# Altium PCB PCB1.PcbDoc
Units mil, origin at the board's own origin, x right, y up, seen from the top; angles counter-clockwise.
Board outline 2500 x 3900 mil, 4 copper layers (Top Layer, Int1 (GND), Int2 (GND), Bottom Layer), stack 53.912 mil thick; 72 components, 56 nets, 270 pads, 13 vias.
Unrouted connection lines stored in the file: 166.
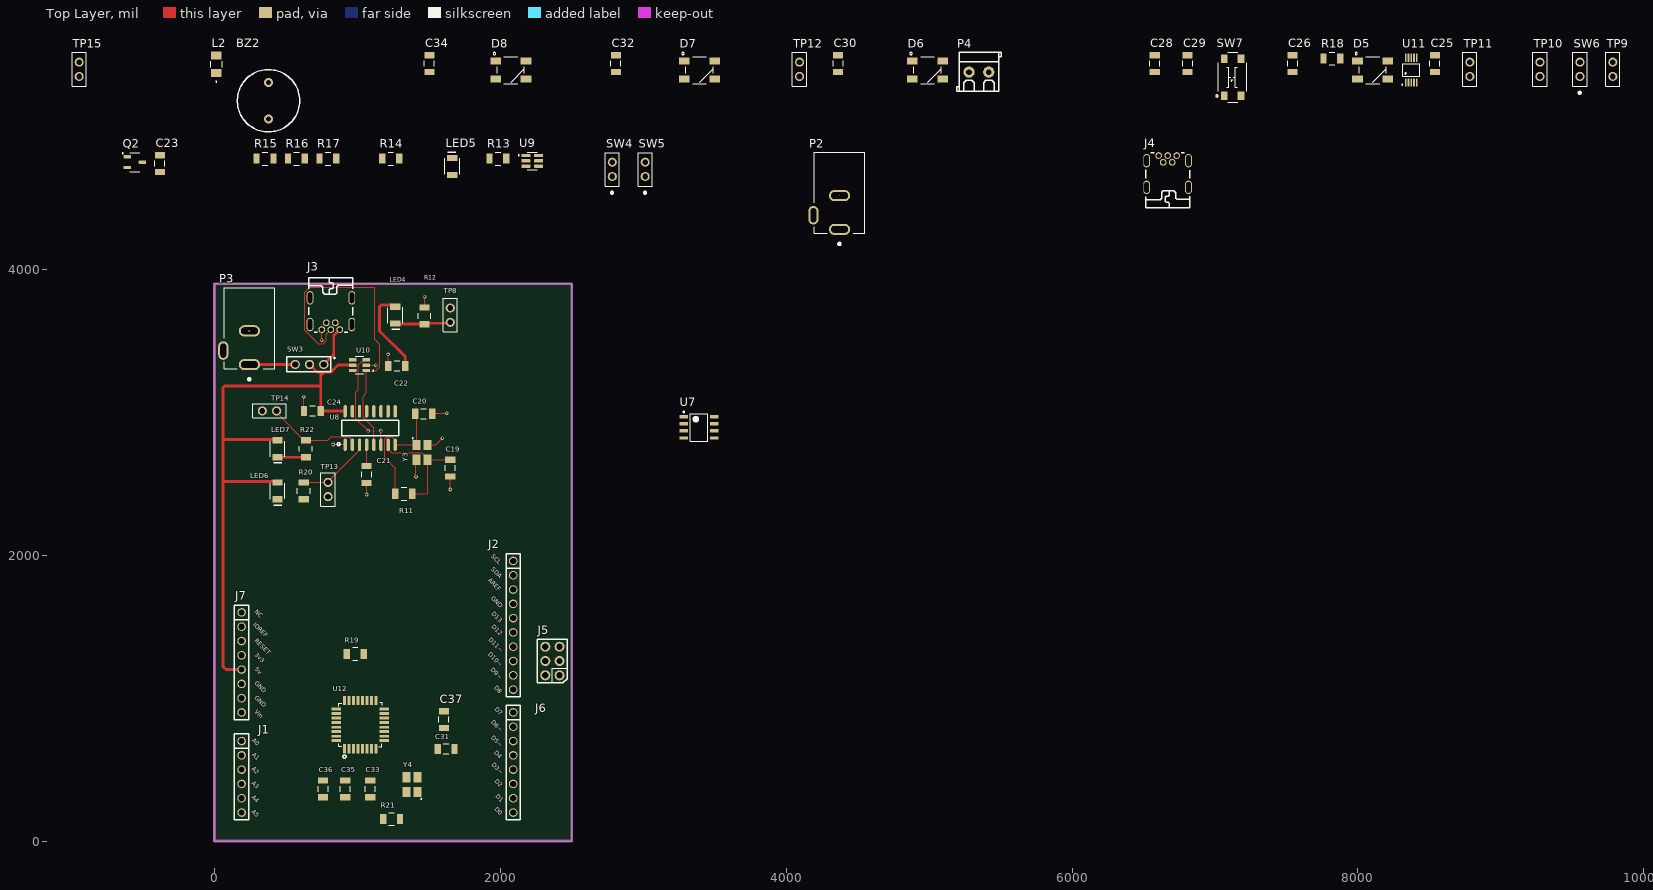
[diagram p0: Top Layer view]
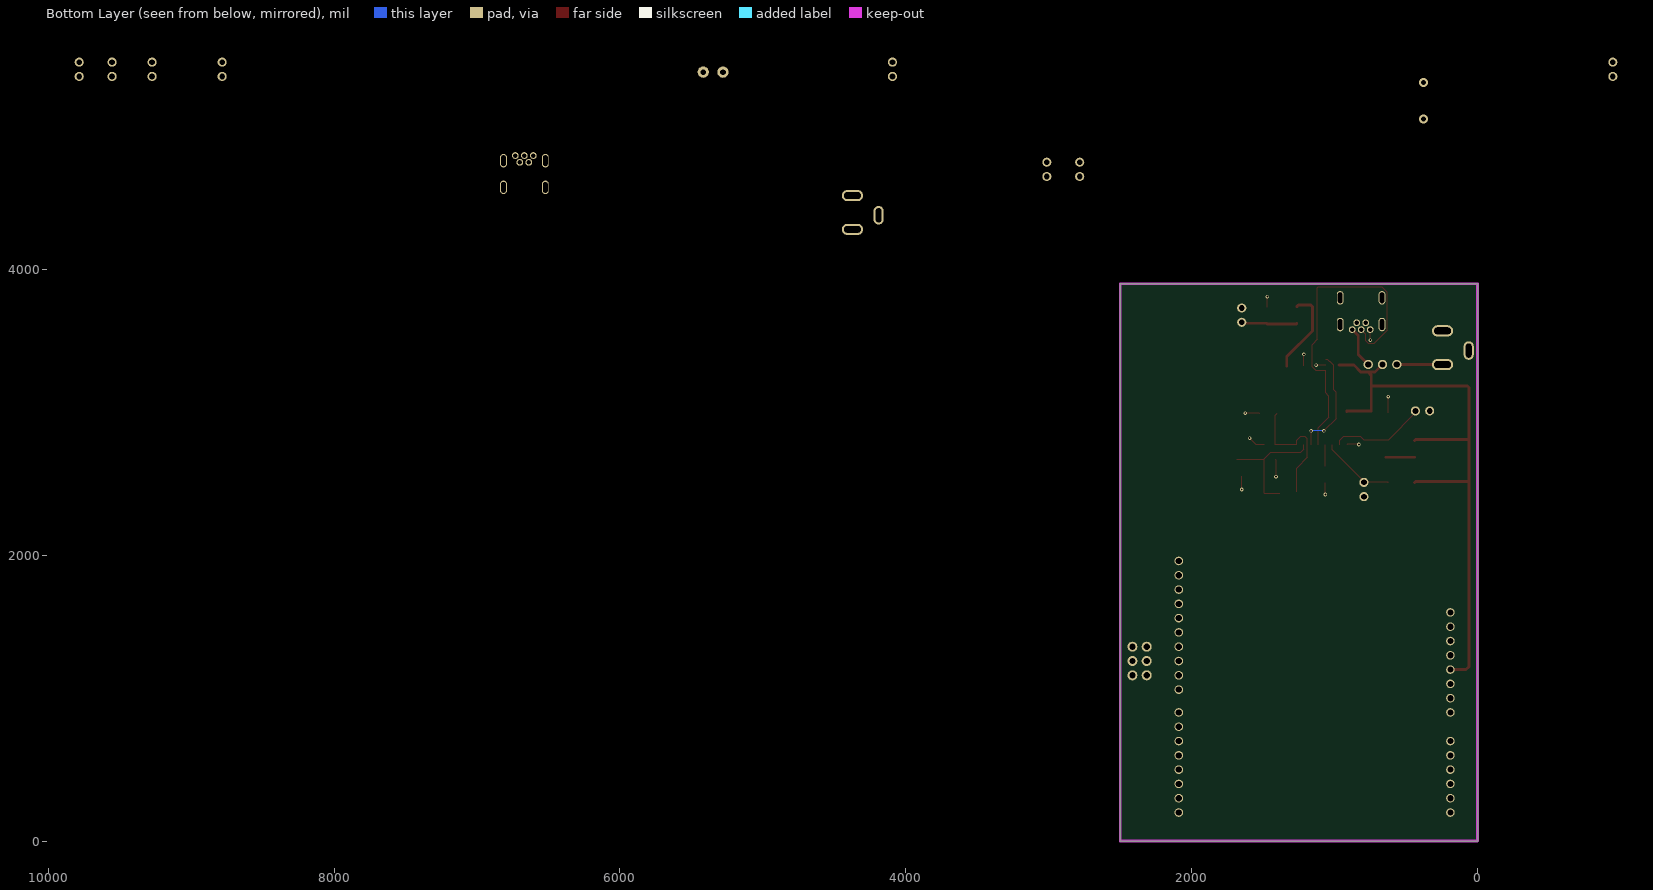
[diagram p1: Bottom Layer view, seen from below]
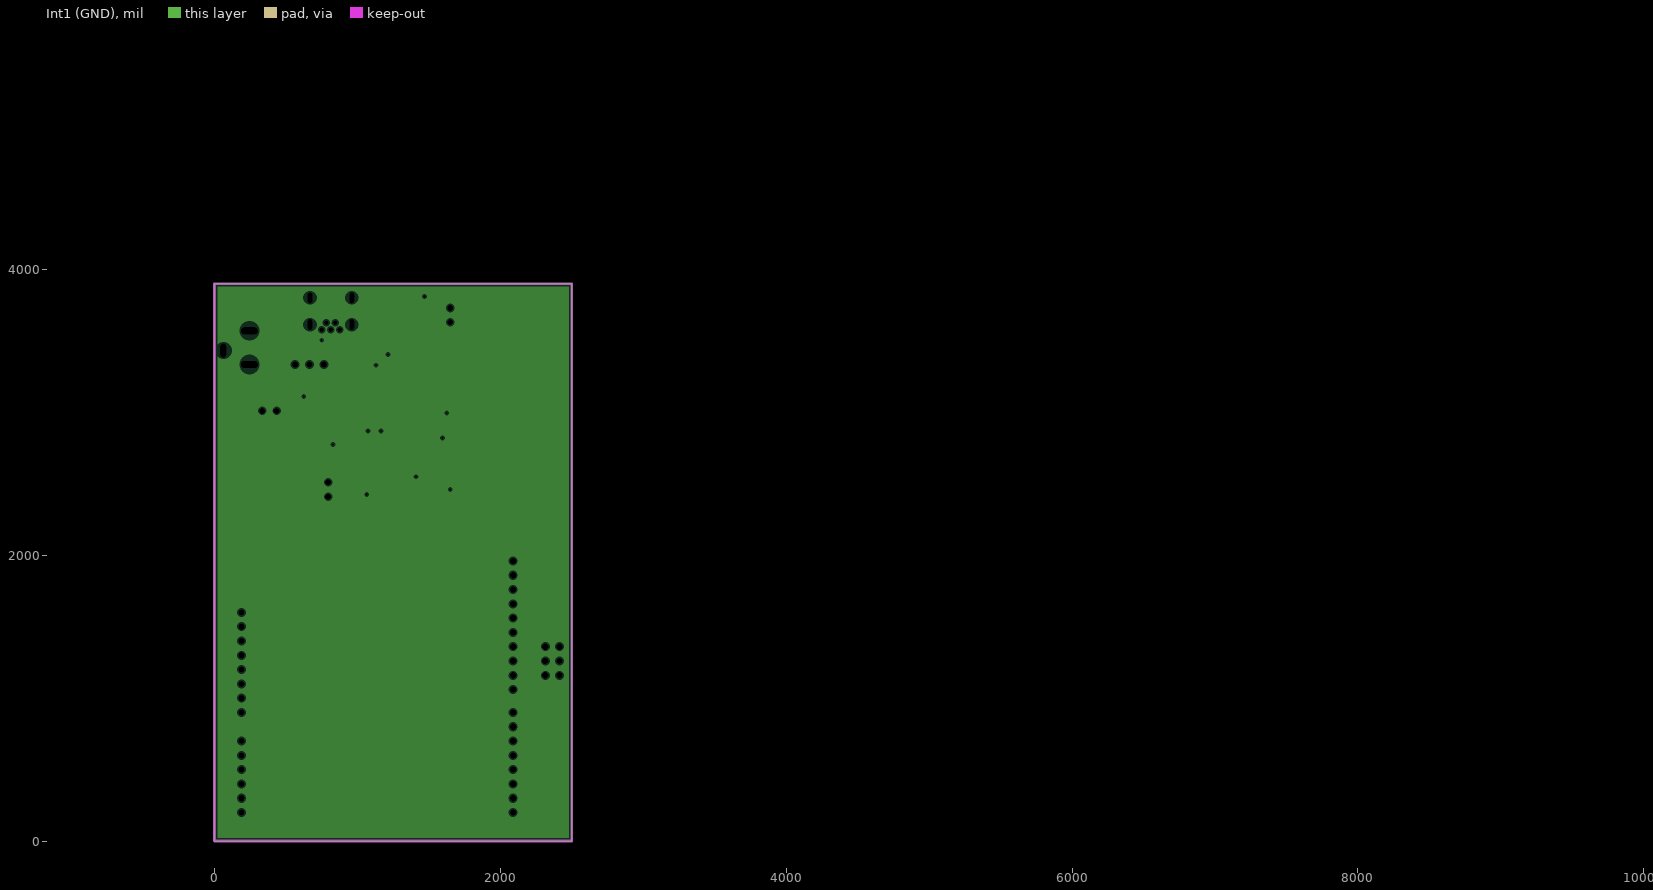
[diagram p2: Int1 (GND), clearances drawn from the general rule]
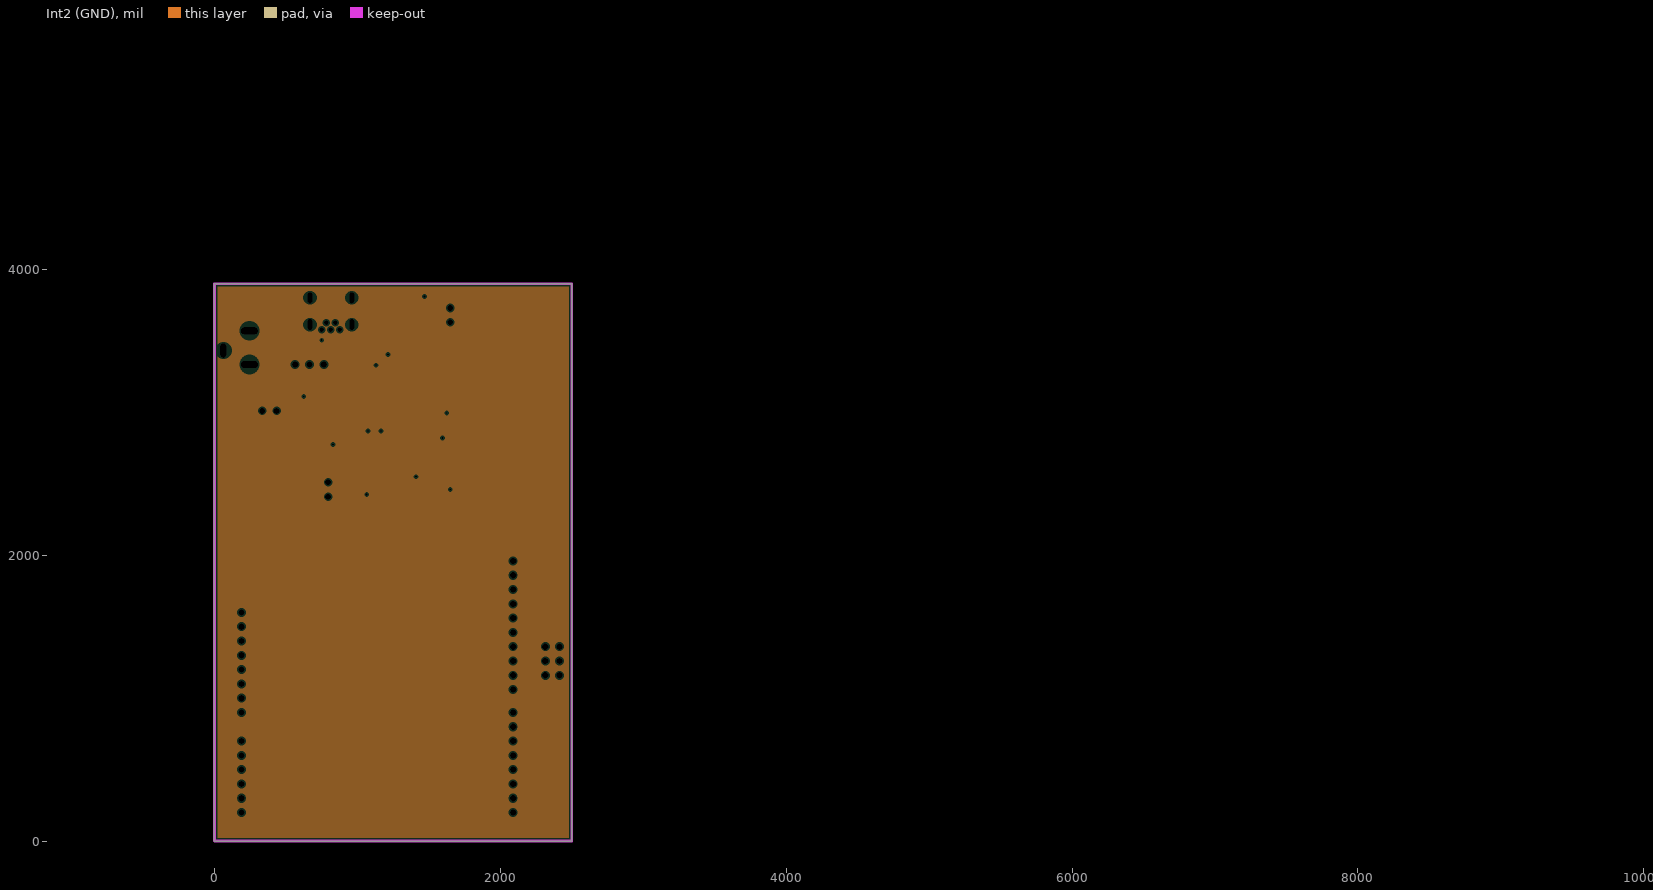
[diagram p3: Int2 (GND), clearances drawn from the general rule]

## Layer stack, top to bottom
Top Solder: solder mask 1, SM-001, Dk 4
Top Layer: signal copper 1.378
Dielectric 1: prepreg 5.1, PP-017, Dk 4.3
Dielectric 2: prepreg 5.1, PP-017, Dk 4.3
Int1 (GND): plane copper 1.378
Dielectric 3: core 28, Core-039, Dk 4.8
Int2 (GND): plane copper 1.378
Dielectric 4: prepreg 5.1, PP-017, Dk 4.3
Dielectric 5: prepreg 5.1, PP-017, Dk 4.3
Bottom Layer: signal copper 1.378
Bottom Solder: solder mask 1, SM-001, Dk 4

## Board outline
0,0 2500,0 2500,3900 0,3900

## Design rules (kind name [scope] priority, off if disabled: settings)
Clearance [All] p1: gap=10 ignorepadtopadclearanceinfootprint=FALSE
PlaneClearance [All] p1: clearance=10
PlaneConnect [All] p1: planeconnectstyle=Direct reliefexpansion=20 reliefentries=4 reliefconductorwidth=10 reliefairgap=10
PolygonConnect [All] p1: connectstyle=Direct reliefconductorwidth=10 reliefentries=4 polygonreliefangle="90 Angle" airgapwidth=10
RoutingVias [All] p1: holewidth=13 width=25 viastyle="Through Hole" minholewidth=13 minwidth=25 maxholewidth=60 maxwidth=80
SolderMaskExpansion [All] p1: expansion=4 istentingtop=FALSE
SupplyNets "Schematic Supply Nets_1" [InNet('+5')] p1: voltage=0.000
SupplyNets "Schematic Supply Nets" [InNet('GND')] p2: voltage=0.000
UnRoutedNet [All] p1: checkbadconnections=TRUE
Width "Schematic Width Constraint_4" [InNet('3.3V')] p1: maxlimit=100 minlimit=10 preferedwidth=20 minimp=50.000000 maximp=50.000000 favimp=50.000000
Width "Schematic Width Constraint_3" [InNet('+5V')] p2: maxlimit=100 minlimit=10 preferedwidth=20 minimp=50.000000 maximp=50.000000 favimp=50.000000
Width "Schematic Width Constraint_2" [InNet('+5')] p3: maxlimit=100 minlimit=10 preferedwidth=20 minimp=50.000000 maximp=50.000000 favimp=50.000000
Width "Schematic Width Constraint_1" [InNet('NetJ3_1')] p4: maxlimit=100 minlimit=10 preferedwidth=20 minimp=50.000000 maximp=50.000000 favimp=50.000000
Width [All] p5: maxlimit=100 minlimit=6 preferedwidth=10 minimp=50.000000 maximp=50.000000 favimp=50.000000
27 further rules are at their usual default settings.

## Components (designator, comment, footprint, x,y, rotation, side; value= is the part's Value field where it differs from the comment)
BZ2 "AT-1224-TWT-5V-2-R" "BUZZER- TH" 378.59,5180 r0 top
C19 "22pF" 1206_Passive_Capacitor 1650,2610 r90 top
C20 "22pF" 1206_Passive_Capacitor 1464,2990 r0 top
C21 "22uF" 1206_Passive_Capacitor 1065,2565 r90 top
C22 "22uF" 1206_Passive_Capacitor 1276,3325 r0 top
C23 "22uF" 1206_Passive_Capacitor -381.41,4740 r90 top
C24 "22uF" 1206_Passive_Capacitor 685,3010 r0 top
C25 "22uF" 1206_Passive_Capacitor 8538.58,5440 r90 top
C26 "22uF" 1206_Passive_Capacitor 7543.58,5440 r90 top
C28 "47nF" 1206_Passive_Capacitor 6578.59,5440 r90 top
C29 "47nF" 1206_Passive_Capacitor 6808.59,5440 r90 top
C30 "47nF" 1206_Passive_Capacitor 4363.59,5440 r90 top
C31 "22pF" 1206_Passive_Capacitor 1621,645 r180 top
C32 "47nF" 1206_Passive_Capacitor 2808.59,5440 r90 top
C33 "22pF" 1206_Passive_Capacitor 1090,365 r90 top
C34 "47nF" 1206_Passive_Capacitor 1503.59,5440 r90 top
C35 "22uF" 1206_Passive_Capacitor 915,365 r90 top
C36 "22uF" 1206_Passive_Capacitor 760,365 r90 top
C37 "10uF" 1206_Passive_Capacitor 1605,850 r90 top
D5 "IN-PI55QATPRPGPBPW" "SERIAL_LED - duplicate" 8103.58,5395 r0 top
D6 "IN-PI55QATPRPGPBPW" "SERIAL_LED - duplicate" 4988.59,5395 r0 top
D7 "IN-PI55QATPRPGPBPW" "SERIAL_LED - duplicate" 3393.59,5395 r0 top
D8 "IN-PI55QATPRPGPBPW" "SERIAL_LED - duplicate" 2073.59,5395 r0 top
J1 "PPTC061LFBN-RC" 6_PIN_ARD-Analog_100mil 190,700 r270 top value=Female
J2 "PPTC101LFBN-RC" 10_PIN_ARDUINO_100MIL 2090,1960 r270 top value=Female
J3 "USB Mini" USB_MINI_B 815,3690 r180 top value="USB mini B"
J4 "USB Mini" USB_MINI_B 6668.59,4685 r0 top value="USB mini B"
J5 "NRPN032PAEN-RC" ICSP 2415,1160 r180 top
J6 "PPTC081LFBN-RC" 8_PIN_ARD-DIG_100MIL 2090,900 r270 top value=Female
J7 "PPTC081LFBN-RC" 8_PIN_ARD-PWR_100MIL 190,1600 r270 top value=Female
L2 "FB_10uH_1206" AIML-1206_ABR-M 13.59,5435 r90 top
LED4 "Green" LED_1206 1265,3680 r270 top
LED5 "Green" LED_1206 1663.59,4720 r90 top
LED6 "Green" LED_1206 440,2450 r270 top
LED7 "Green" LED_1206 440,2745 r270 top
P2 "Power Jack" Power_Jack 4373.59,4280 r90 top value="CONN PWR JACK 2X5.5MM SOLDER"
P3 "Power Jack" Power_Jack 245,3333.78 r90 top value="CONN PWR JACK 2X5.5MM SOLDER"
P4 "2P Screw Terminal Block" "P_Terminal block 3.5mm-pitch" 5348.59,5380 r0 top
Q2 "AO3400A" N-MOSFET -556.41,4750 r0 top value="N channel"
R11 "1M" 1206_Passive_Resitor 1325,2430 r0 top value="1M Ohm"
R12 "1k" 1206_Passive_Resitor 1470,3675 r270 top value="1K Ohm"
R13 "0 Ohm" 1206_Passive_Resitor 1983.59,4775 r0 top
R14 "1k" 1206_Passive_Resitor 1233.59,4775 r0 top value="1K Ohm"
R15 "10 Ohm" 1206_Passive_Resitor 353.59,4775 r0 top
R16 "10k" 1206_Passive_Resitor 573.59,4775 r0 top value=10KOhm
R17 "4.7KOhm" 1206_Passive_Resitor 793.59,4775 r0 top
R18 "1k" 1206_Passive_Resitor 7818.58,5475 r0 top value="1K Ohm"
R19 "10k" 1206_Passive_Resitor 985,1310 r180 top value=10KOhm
R20 "1k" 1206_Passive_Resitor 625,2450 r270 top value="1K Ohm"
R21 "1M" 1206_Passive_Resitor 1240,155 r0 top value="1M Ohm"
R22 "1k" 1206_Passive_Resitor 640,2745 r90 top value="1K Ohm"
SW3 "PREC003SAAN-RC" 3_PIN_100mil 765,3335 r180 top value="CONN HEADER VERT 3POS 2.54MM"
SW4 "SW_2Pin_100mil_Switch" 2Pin-Header-Conn 2783.59,4650 r90 top
SW5 "SW_2Pin_100mil_Switch" 2Pin-Header-Conn 3013.59,4650 r90 top
SW6 "SW_2Pin_100mil_Switch" 2Pin-Header-Conn 9553.58,5350 r90 top
SW7 "TL3305AF160QG" Switch_JLC 7123.59,5345 r90 top
TP8 "10x Probe TP" TP_Diff_Probe 1650,3630 r90 top
TP9 "10x Probe TP" TP_Diff_Probe 9783.58,5350 r90 top
TP10 "10x Probe TP" TP_Diff_Probe 9273.58,5350 r90 top
TP11 "10x Probe TP" TP_Diff_Probe 8783.58,5350 r90 top
TP12 "10x Probe TP" TP_Diff_Probe 4093.59,5350 r90 top
TP13 "10x Probe TP" TP_Diff_Probe 795,2510 r270 top
TP14 "10x Probe TP" TP_Diff_Probe 435,3010 r180 top
TP15 "10x Probe TP" TP_Diff_Probe -946.41,5350 r90 top
U7 "MCP6002T-I/SN" SOIC127P600X175-8N 3390,2895 r0 top
U8 "CH340G" "USB to serial" 1090,2890 r0 top value="USB to Serial"
U9 "DAC IC" MCP4725 2223.59,4760 r0 top
U10 "TESD5V0V4UCX6_RFG" SOT95P280X145-6N 1015,3330 r180 top
U11 "ADS1115IDGSR" ADC_ADS1115IDGSR 8373.58,5395 r90 top
U12 "ATMEGA328P-ANR" ATMega328P 1020,815 r270 top value="IC MCU 8BIT 32KB FLASH 32TQFP"
Y3 "X322512MSB4SI" "Crystal resonator" 1455,2720 r270 top value=12MHz
Y4 "X322516MLB4SI" "Crystal resonator" 1380,395 r90 top value=16MHz

## Footprints (in the part's own frame and the unit in brackets; to place one, negate y for a bottom-side part, rotate by r counter-clockwise, add the part's x,y. Pads: shape width x height; smd on the part's side, far side on the other; paste and mask are expansions set on the pad)
2Pin-Header-Conn [mm]
  round 1.62 hole 1.02: 1(0,0) 2(2.54,0)
  silkscreen extent -3.03,-1.27 4.26,1.26, body extent -1.27,-1.27 3.81,1.27, height 8.13
3_PIN_100mil [mm]
  round 1.65 hole 1.1: 1(0,0) 2(2.54,0) 3(5.08,0)
  silkscreen extent -2,-1.4 6.6,1.27, body extent -1.14,-1.27 6.48,1.27, height 8.38
6_PIN_ARD-Analog_100mil [mil]
  round 60 hole 43.31: 1(0,0) 2(100,0) 3(200,0) 4(300,0) 5(400,0) 6(500,0)
  silkscreen extent -50,-50 550,50, body extent -59,-49 561,51, height 335
8_PIN_ARD-DIG_100MIL [mil]
  round 60 hole 43.31: 1(0,0) 2(100,0) 3(200,0) 4(300,0) 5(400,0) 6(500,0) 7(600,0) 8(700,0)
  silkscreen extent -50,-50 750,50, body extent -60,-50 760,50, height 335
8_PIN_ARD-PWR_100MIL [mil]
  round 60 hole 43.31: 1(0,0) 2(100,0) 3(200,0) 4(300,0) 5(400,0) 6(500,0) 7(600,0) 8(700,0)
  silkscreen extent -50,-50 750,50, body extent -60,-50 760,50, height 335
10_PIN_ARDUINO_100MIL [mil]
  round 60 hole 43.31: 1(0,0) 2(100,0) 3(200,0) 4(300,0) 5(400,0) 6(500,0) 7(600,0) 8(700,0) 9(800,0) 10(900,0)
  silkscreen extent -50,-50 950,50, body extent -60,-49 960,51, height 335
1206_Passive_Capacitor [mil]
  rect 44x71 smd: 1(-59,0) 2(59,0)
  silkscreen extent -19,-35 19,35, body extent -63,-31 63,32, height 50
1206_Passive_Resitor [mil]
  rect 44x71 smd: 1(-59,0) 2(59,0)
  silkscreen extent -19,-45 19,45, body extent -61,-31 61,31, height 26
ADC_ADS1115IDGSR [mm] "*SOP50P490X110-10N"
  rect 1.45x0.3 smd mask+0.025: 1(-2.2,1)
  rect 1.47x0.3 smd mask+0.025: 2(-2.2,0.5) 3(-2.2,0) 4(-2.2,-0.5) 5(-2.2,-1) 6(2.2,-1) 7(2.2,-0.5) 8(2.2,0) 9(2.2,0.5) 10(2.2,1)
  silkscreen extent -2.68,-1.5 1.15,1.68, body extent -2.44,-1.49 2.46,1.51, height 1.1
AIML-1206_ABR-M [mil]
  rect 54x73 smd paste+0 mask+0: 1(-61.5,0) 2(61.5,0)
  silkscreen extent -124,-40 22,40, body extent -66,-36 66,36, height 55
ATMega328P [mm]
  rect 1.65x0.508 smd mask+0.025: 1(4.28,-2.794) 2(4.28,-2.007) 3(4.28,-1.194) 4(4.28,-0.406) 5(4.28,0.406) 6(4.28,1.194) 7(4.28,2.007) 8(4.28,2.794) 17(-4.28,2.794) 18(-4.28,2.007) 19(-4.28,1.194) 20(-4.28,0.406) 21(-4.28,-0.406) 22(-4.28,-1.194) 23(-4.28,-2.007) 24(-4.28,-2.794)
  rect 0.508x1.65 smd mask+0.025: 9(2.843,4.28) 10(2.056,4.28) 11(1.243,4.28) 12(0.455,4.28) 13(-0.357,4.28) 14(-1.145,4.28) 15(-1.958,4.28) 16(-2.745,4.28) 25(-2.745,-4.28) 26(-1.958,-4.28) 27(-1.145,-4.28) 28(-0.357,-4.28) 29(0.455,-4.28) 30(1.243,-4.28) 31(2.056,-4.28) 32(2.843,-4.28)
  silkscreen extent -3.94,-3.81 5.97,3.94, body extent -4.45,-4.47 4.55,4.53, height 1.16
"BUZZER- TH" [mm]
  round 1.6 hole 0.9: 1(0,3.25) 2(0,-3.25)
  silkscreen extent -5.53,-5.54 5.54,5.54, body extent -6,-6 6,8.75, height 9.05
"Crystal resonator" [mm]
  rect 1.8x1.4 smd: 1(-1.32,-1.02) 2(1.32,-1.02) 3(1.32,0.92) 4(-1.32,0.92)
  silkscreen extent -2.63,-1.79 -2.45,-1.61, body extent -1.65,-1.2 1.65,1.2, height 0.8
ICSP [mil]
  round 70 hole 43.31: 1(0,0) 2(0,-100) 3(0,-200) 4(100,0) 5(100,-100) 6(100,-200)
  silkscreen extent -52,-252 157,52, body extent -44,-250 146,50, height 330
LED_1206 [mil]
  rect 44x71 smd: 1(-59,0) 2(59,0)
  silkscreen extent -54,-51 99,51, body extent -63,-31 63,31, height 28
MCP4725 [mm]
  rrect25% 1.61x0.59 smd: 1(-1.145,0.95) 2(-1.145,0) 3(-1.145,-0.95) 4(1.145,-0.95) 5(1.145,0) 6(1.145,0.95)
  silkscreen extent -2.5,-1.56 0.9,1.56, body extent -1.6,-1.55 1.6,1.55, height 1.45
N-MOSFET [mm]
  rrect50% 1.35x0.59 smd: 1(-1.33,0.95) 2(-1.33,-0.95) 3(1.33,0)
  silkscreen extent -2.28,-1.68 0.89,1.7, body extent -1.55,-1.55 1.45,1.55, height 1.25
"P_Terminal block 3.5mm-pitch" [mm]
  round 2 hole 1: 1(-1.75,0) 2(1.75,0)
  silkscreen extent -3.95,-3.4 3.95,3.5, body extent -3.5,-3.4 3.5,3.4, height 8.4
Power_Jack [mm]
  oval 2x3.8 hole 1.2 slot 3 at 90 deg: 1(0,0) 2(6,0)
  oval 3.3x1.8 hole 1 slot 2.5 at 0 deg: 3(2.5,4.65)
  silkscreen extent -2.79,-4.5 13.68,4.5, body extent -0.76,-4.45 13.64,4.95, height 11.49
"SERIAL_LED - duplicate" [mil] "Footprint for serial LED"
  rect 74.8x47.5 smd: 1(-106.3,63.5) 2(-106.3,-63.5) 3(106.3,-63.5) 4(106.3,63.5)
  silkscreen extent -124,-94 95,124, body extent -106,-98 106,98, height 63
SOIC127P600X175-8N [mm] "SOIC, 8-Leads, Body 4.90x3.90mm, Pitch 1.27mm, IPC Medium Density"
  rect 1.55x0.6 smd: 1(-2.7,1.905) 2(-2.7,0.635) 3(-2.7,-0.635) 4(-2.7,-1.905) 5(2.7,-1.905) 6(2.7,-0.635) 7(2.7,0.635) 8(2.7,1.905)
  silkscreen extent -2.82,-2.45 1.55,2.88, body extent -3,-2.45 3,2.45, height 1.75
SOT95P280X145-6N [mm]
  rrect25% 1.35x0.58 smd: 1(-1.185,0.95) 2(-1.185,0) 3(-1.185,-0.95) 4(1.185,-0.95) 5(1.185,0) 6(1.185,0.95)
  silkscreen extent -2.52,-1.57 0.75,1.57, body extent -1.4,-1.45 1.4,1.45, height 1.45
Switch_JLC [mm]
  rect 1.5x1.2 smd: 1(-3.3,1.5) 2(3.3,1.5) 3(-3.3,-1.5) 4(3.3,-1.5)
  silkscreen extent -4.44,-2.54 4.45,3, body extent -3.8,-2.29 3.7,2.21, height 3.7
TP_Diff_Probe [mm]
  round 1.62 hole 1.02: 1(0,0) 2(2.54,0)
  silkscreen extent -1.72,-1.27 4.26,1.26
"USB to serial" [mil]
  oval 24x86.61 smd: 1(-175,-117) 2(-125,-117) 3(-75,-117) 4(-25,-117) 5(25,-117) 6(75,-117) 7(125,-117) 8(175,-117) 9(175,117) 10(125,117) 11(75,117) 12(25,117) 13(-25,117) 14(-75,117) 15(-125,117) 16(-175,117)
  silkscreen extent -231,-122 201,56, body extent -197,-118 197,118, height 71
USB_MINI_B [mm]
  round 1.2 hole 0.8: 1(-1.58,2.826) 2(-0.78,1.622) 3(0.02,2.826) 4(0.82,1.622) 5(1.62,2.826)
  oval 1.2x2.4 hole 0.8 slot 1.9 at 90 deg: 6(-3.72,1.924) 7(3.72,1.924) 8(-3.72,-2.826) 9(3.72,-2.826)
  silkscreen extent -3.89,-6.42 3.93,3.3, body extent -4.04,-6.83 4.06,3.02, height 3.98

## Part data
BZ2: library part BUZZER_1, "Buzzers Transducer, Externally Driven Electromechanical/Magnetic 5 V 40mA 2.4kHz 87dB @ 5V, 10cm Through Hole PC Pins", Datasheet=https://www.puiaudio.com/media/SpecSheet/AT-1224-TWT-5V-2-R.pdf
C19 C20 C31 C33: library part C_22pF_1206, "22pF ±5% 1kV C0G 1206 Multilayer Ceramic Capacitors MLCC - SMD/SMT RoHS", LCSC Part#=C107174, MFR Part #=CC1206JKNPOCBN220, Datasheet=https://datasheet.lcsc.com/lcsc/1810241219_YAGEO-CC1206JKNPOCBN220_C107174.pdf, Type=Extended
C21 C22 C23 C24 C25 C26 C35 C36: library part C_22uF_1206, "22uF ±10% 25V X5R 1206 Multilayer Ceramic Capacitors MLCC - SMD/SMT RoHS", LCSC Part#=C12891, MFR Part #=CL31A226KAHNNNE, Datasheet=https://datasheet.lcsc.com/lcsc/1811031514_Samsung-Electro-Mechanics-CL31A226KAHNNNE_C12891.pdf, Type=basic
C28 C29 C30 C32 C34: library part C_47nF_1206, "47nF ±5% 50V C0G 1206 Multilayer Ceramic Capacitors MLCC - SMD/SMT RoHS", LCSC Part#=C21812, MFR Part #=GRM31M5C1H473JA01L, Datasheet=https://datasheet.lcsc.com/lcsc/1810201313_Murata-Electronics-GRM31M5C1H473JA01L_C21812.pdf, Type=Extended
C37: library part C_10uF_1206, "10uF ±10% 50V X5R 1206 Multilayer Ceramic Capacitors MLCC - SMD/SMT RoHS", LCSC Part#=C13585, MFR Part #=CL31A106KBHNNNE, Datasheet=https://datasheet.lcsc.com/lcsc/1810221112_Samsung-Electro-Mechanics-CL31A106KBHNNNE_C13585.pdf, Type=Basic
D5 D6 D7 D8: library part LED_Smart, "LIGHT EMITTING DIODES (LED) RGB 620~630NM RED, 520~530NM GREEN, 465~475NM BLUE 600MCD@16MARED,1200MCD@16MAGREEN,300MCD@16MABLUE TOP VIEW SMD-4 ROHS", LCSC Part#=C2843785, Manufacturer=XINGLIGHT, MFR Part #=XL-5050RGBC-WS2812B, Datasheet=https://datasheet.lcsc.com/lcsc/2301111130_XINGLIGHT-XL-5050RGBC-WS2812B_C2843785.pdf
J1: library part JF_6_PIN_FEMA_ARD-Anolog, "6 Position Header Connector 0.100\" (2.54mm) Through Hole Tin", LCSC Part#=C40877, Digikey Link=https://www.digikey.com/product-detail/en/PPTC061LFBN-RC/S7004-ND/810145/?itemSeq=304982353, MFR Part #=PPTC061LFBN-RC, Type=Extended
J2: library part JF_10_PIN_FEMA_ARDUINO, "10 Position Header Connector 0.100\" (2.54mm) Through Hole Tin", LCSC Part#=C225507, Digikey Link=https://www.digikey.com/product-detail/en/PPTC101LFBN-RC/S7008-ND/810149/?itemSeq=304982352, MFR Part #=PPTC101LFBN-RC, Type=Extended
J3 J4: library part J_USB_B_Mini, "Through Hole USB Connectors RoHS", LCSC Part#=C46398, MFR Part #=920-462A2021D10102, Datasheet=https://datasheet.lcsc.com/szlcsc/2103081233_Jing-Extension-of-the-Electronic-Co-920-462A2021D10102_C46398.pdf, Type=Extended
J5: library part J_ICSP, "Connector Header Through Hole 6 position 0.079\" (2.00mm)", LCSC Part#=C124384, Digikey Link=https://www.digikey.com/product-detail/en/NRPN032PAEN-RC/S5801-03-ND/804955/?itemSeq=304982355, MFR Part #=NRPN032PAEN-RC, Type=Extended
J6: library part JF_8_PIN_FEMA_ARD-Dig, "8 Position Header Connector 0.100\" (2.54mm) Through Hole Tin", LCSC Part#=C27438, Digikey Link=https://www.digikey.com/product-detail/en/PPTC081LFBN-RC/S7006-ND/810147/?itemSeq=304982354, MFR Part #=PPTC081LFBN-RC, Type=Extended
J7: library part JF_8_PIN_FEMA_ARD-Pwr, "8 Position Header Connector 0.100\" (2.54mm) Through Hole Tin", LCSC Part#=C27438, Digikey Link=https://www.digikey.com/product-detail/en/PPTC081LFBN-RC/S7006-ND/810147/?itemSeq=304982354, MFR Part #=PPTC081LFBN-RC, Type=Extended
L2: "25mA 10uH ±10% 800mΩ 1206  Inductors (SMD) ROHS", LCSC Part#=C1051, MFR Part #=CMI321609X100KT, Mfr_Name="FH (Guangdong Fenghua Advanced Tech)", Datasheet=https://datasheet.lcsc.com/lcsc/1810311314_FH--Guangdong-Fenghua-Advanced-Tech-CMI321609X100KT_C1051.pdf, Type=Basic
LED4 LED5 LED6 LED7: library part LED_GREEN_1206, "Green 513~528nm 1206 Light Emitting Diodes (LED) RoHS", LCSC Part#=C434439, MFR Part #=SZYY1206G, Datasheet=https://datasheet.lcsc.com/lcsc/2006301532_Yongyu-Photoelectric-SZYY1206G_C434439.pdf, Type=Extended
P2 P3: library part "P_Power Jack", "Power Barrel Connector Jack 2.10mm ID (0.083\"), 5.50mm OD (0.217\") Through Hole, Right Angle", LCSC Part#=C136744, MFR Part #=PJ-102A, Digikey Link=https://www.digikey.com/product-detail/en/PJ-102A/CP-102A-ND/275425/?itemSeq=304982367, Type=Extended
P4: library part "P_Terminal block", "Green Straight pin 3.5mm  pitch; P=3.5mm  Screw terminal ROHS", LCSC Part#=C474892, Manufacturer="Cixi Kefa Elec", MFR Part #=KF350-3.5-2P, Datasheet=https://datasheet.lcsc.com/lcsc/2001160007_Cixi-Kefa-Elec-KF350-3-5-2P_C474892.pdf
Q2: library part Q_Nch_MOSFET, "MOSFET N Trench 30V 5.7A 1.5V @ 250uA 26.5 m? @ 5.7A,10V SOT-23-3L RoHS", LCSC Part#=C20917, Datasheet=https://datasheet.lcsc.com/szlcsc/Alpha-Omega-Semicon-AOS-AO3400A_C20917.pdf, MFR Part #=AO3400A, Type=Basic
R11 R21: library part R_1M_1206, "CHIP RESISTOR - SURFACE MOUNT 1MOHMS ±1% 1/4W 1206 ROHS", LCSC Part#=C17927, MFR Part #=RMCF1206JT1M00, Digikey Link=https://www.digikey.com/product-detail/en/RMCF1206JT1M00/RMCF1206JT1M00CT-ND/1942830/?itemSeq=304982358, Type=Basic
R12 R14 R18 R20 R22: library part R_1K_1206, "CHIP RESISTOR - SURFACE MOUNT 1KOHMS ±1% 1/4W 1206 ROHS", LCSC Part#=C4410, MFR Part #=RNCP1206FTD1K00CT, Digikey Link=https://www.digikey.com/product-detail/en/RNCP1206FTD1K00/RNCP1206FTD1K00CT-ND/2240675/?itemSeq=304982373, Type=Basic
R13: library part R_0Ohm_1206, "CHIP RESISTOR - SURFACE MOUNT 0OHMS ±1% 1/4W 1206 ROHS", LCSC Part#=C17888, MFR Part #=1206W4F0000T5E, Datasheet=https://datasheet.lcsc.com/szlcsc/Uniroyal-Elec-1206W4F0000T5E_C17888.pdf, Mouser link=https://www.mouser.com/ProductDetail/Royalohm/1206W4F0000T5E?qs=e8oIoAS2J1Thbopin%252BsagQ%3D%3D, Type=Basic
R15: library part R_10Ohm_1206, "CHIP RESISTOR - SURFACE MOUNT 0.1OHMS ±1% 1/4W 1206 ROHS", LCSC Part#=C17903, MFR Part #=1206W4F100JT5E, Datasheet=https://datasheet.lcsc.com/szlcsc/Uniroyal-Elec-1206W4F100JT5E_C17903.pdf, Type=Basic
R16 R19: library part R_10KOhm_1206, "10 kOhms ±5% 0.25W, 1/4W Chip Resistor 1206 (3216 Metric) Automotive AEC-Q200 Thick Film", LCSC Part#=C17902, MFR Part #=RMCF1206FT10K0, Digikey Link=https://www.digikey.com/en/products/detail/stackpole-electronics-inc/RMCF1206FT10K0/1759669, Type=Basic
R17: library part R_4.7k_1206, "4.7kΩ ±1% 0.25W ±100ppm/℃ 1206 Chip Resistor - Surface Mount RoHS", LCSC Part#=C17936, MFR Part #=1206W4F4701T5E, Datasheet=https://datasheet.lcsc.com/lcsc/1810301414_UNI-ROYAL-Uniroyal-Elec-1206W4F4701T5E_C17936.pdf, Type=Basic
SW3: library part SW_3Pin_100mil_Switch, "Connector Header Through Hole 3 position 0.100\" (2.54mm)", LCSC Part#=C49257, Digikey Link=https://www.digikey.com/product-detail/en/PREC003SAAN-RC/S1012EC-03-ND/2774851/?itemSeq=304982371, MFR Part #=PREC003SAAN-RC, Type=Extended
SW4 SW5 SW6: "2Pin Header", LCSC Part#=C124375, Type=Extended
SW7: library part SW_Push_Button_JLC, "Tactile Switch SPST-NO Top Actuated Surface Mount", LCSC Part#=C2837550, MFR Part #=KH-4.5X4.5X4.3H-STM, Datasheet=https://datasheet.lcsc.com/lcsc/2106081532_Shenzhen-Kinghelm-Elec-KH-4.5X4.5X4.3H-STM_C2837550.pdf, Type=Extended
TP8 TP9 TP10 TP11 TP12 TP13 TP14 TP15: library part TP_Diff_Probe, "Test Point 300 mil centers"
U7: library part U_MCP6002T-I/SN, "0.6 V/us 2 1MHz 1.8V ~ 6V 100μA General Purpose SOIC-8_150mil  Operational Amplifier ROHS", LCSC Part#=C7377, Mfr=Microchip, Datasheet=https://ww1.microchip.com/downloads/en/DeviceDoc/MCP6001-1R-1U-2-4-1-MHz-Low-Power-Op-Amp-DS20001733L.pdf, MFR Part #=MCP6002T-I/SN, Type=Basic
U8: library part U_USBtoSerial, "Transceiver USB 2.0 2Mbps SOP-16_150mil USB ICs RoHS", LCSC Part#=C14267, Datasheet=https://datasheet.lcsc.com/lcsc/2008191806_WCH-Jiangsu-Qin-Heng-CH340G_C14267.pdf, MFR Part #=CH340G, Type=Basic
U9: library part U_MCP4725A0T-E/CH, "IC DAC 12BIT V-OUT SOT23-6", LCSC Part#=C144198, MFR Part #=MCP4725A0T-E/CH, Datasheet=https://ww1.microchip.com/downloads/en/DeviceDoc/22039d.pdf, Type=Extended
U10: "SOT-26, 5V, 75W, 0.6pF, ESD Protection", Package=None, Check_prices=https://www.snapeda.com/parts/TESD5V0V4UCX6%20RFG/Taiwan+Semiconductor/view-part/?ref=eda, MF="Taiwan Semiconductor", MP="TESD5V0V4UCX6 RFG", SnapEDA_Link=https://www.snapeda.com/parts/TESD5V0V4UCX6%20RFG/Taiwan+Semiconductor/view-part/?ref=snap
U11: library part U_ADC_ADS1115IDGSR, "16-Bit ADC with Integrated MUX, PGA, Comparator, Oscillator, and Reference 10-VSSOP -40 to 125", LCSC Part#=C37593, Package="MSOP-10 Texas Instruments", Digikey Link=https://www.digikey.com/product-detail/en/texas-instruments/ADS1115IDGSR/296-38849-1-ND/5142969?utm_source=snapeda&utm_medium=aggregator&utm_campaign=symbol, MFR Part #=ADS1115IDGSR, SnapEDA_Link=https://www.snapeda.com/parts/ADS1115IDGSR/Texas%20Instruments/view-part/?ref=snap, Type=Extended
U12: library part U_ATMega328P, "AVR AVR® ATmega Microcontroller IC 8-Bit 20MHz 32KB (16K x 16) FLASH 32-TQFP (7x7)", LCSC Part#=C14877, MFR Part #=ATMEGA328P-AU, Digikey Link=https://www.digikey.com/product-detail/en/ATMEGA328P-ANR/ATMEGA328P-ANRCT-ND/2774230/?itemSeq=304982365, Type=Basic
Y3: library part X_12MHz_Res, "SMD Crystal Resonators 12MHz ±10ppm SMD-3225_4P RoHS", LCSC Part#=C9002, Datasheet=https://datasheet.lcsc.com/szlcsc/Yangxing-Tech-X322512MSB4SI_C9002.pdf, MFR Part #=X322512MSB4SI, Type=Basic
Y4: library part X_16Mhz_Res, "±10ppm 16000000Hz -40℃~85℃ 贴片无源晶振 60Ω 9pF SMD3225-4P Crystals ROHS", LCSC Part#=C13738, MFR Part #=X322516MLB4SI, Type=Basic

## Via types
v1: diameter 25, hole 13, Top Layer to Bottom Layer, 13 vias

## Nets (pads, with @x,y where several pads share a name; then routed paths per layer and width w, separated by ;. In a path a pad name is that pad's centre, name@x,y a point inside that pad or via, vN(x,y) a via of type N, cw(c..) or ccw(c..) an arc to the next point about the centre after c; other vN are vias at no path point)
3.3V: J7.4
+5: P3.1 SW3.3 | length 320.5
  Top Layer w20: P3.1 245.61,3334.39 564.39,3334.39 SW3.3
+5V: C22.2 C24.2 C26.2 C29.2 C30.2 C35.2 C36.2 D5.1 D6.1 J5.4 J7.5 J7.8 L2.1 LED4.1 LED6.1 LED7.1 R19.1 SW3.2 U7.8 U8.16 U9.3 U10.5 U11.8 U12.4 U12.6 | length 4952.6
  Top Layer w20: J7.5 80,1200 60,1220 60,2515 ; LED6.1 434,2515 60,2515 ; LED7.1 434,2810 60,2810 ; SW3.2 717.48,3282.52 767.58,3282.52 ; U8.16 915,3008.15 913.15,3010 C24.2 744,3185 ; U10.5 865.16,3330 817.68,3282.52 767.58,3282.52 ; LED4.1 1254,3750 1166.72,3750 1155,3738.28 1155,3570 1335,3390 C22.2 ; 60,2515 60,2810 ; 60,2810 60,3173.28 71.72,3185 744,3185 ; 744,3185 744,3258.94 767.58,3282.52
A0_PC0: J1.1 U12.23
A1_PC1: J1.2 U12.24
A2_PC2: J1.3 U12.25
A3_PC3: J1.4 U12.26
A4_PC4: J1.5 J2.2 U9.4 U11.9 U12.27
A5_PC5: J1.6 J2.1 U9.5 U11.10 U12.28
A_REF: J2.3 U12.20
DTR: U8.13
GND: BZ2.2 C19.1 C20.2 C21.1 C22.1 C23.1 C24.1 C25.2 C26.1 C28.2 C29.1 C30.1 C31.1 C32.1 C33.1 C34.1 C35.1 C36.1 C37.1 D5.3 D6.3 D7.3 D8.2 D8.3 J2.4 J3.5 J3.6 J3.7 J3.8 J3.9 J4.5 J4.6 J4.7 J4.8 J4.9 J5.6 J7.6 J7.7 P2.2 P2.3 P3.2 P3.3 P4.2 R12.1 R13.1 R14.1 R17.2 SW7.1 SW7.2 TP8.2 TP9.2 TP10.2 TP12.2 TP13.2 TP14.2 TP15.2 U7.4 U8.1 U9.2 U10.2 U11.1 U11.3 U11.7 U12.3 U12.5 U12.21 Y3.2 Y3.4 Y4.2 Y4.4 | length 1019
  Top Layer w6: v1(625,3110) 625,3011 C24.1 C24.1@626,2996.5 ; v1(750,3505) 750.61,3505.61 750.61,3578.13 J3.5 ; v1(830,2775) 913,2775 U8.1 ; U10.2 v1(1130,3330) ; v1(1065,2425) C21.1 ; v1(1215,3405) 1215,3327 C22.1 ; v1(1410,2550) 1410,2663.19 Y3.2 ; R12.1 v1(1470,3810) ; Y3.4 1546.97,2771.97 v1(1595,2820) ; C20.2 1528,2995 v1(1625,2995) ; v1(1650,2460) C19.1
NetC21_2: C21.2 U8.4 | length 149
  Top Layer w6: C21.2 U8.4
NetC28_1: C28.1 SW7.3
NetC31_2: C31.2 R21.2 U12.8 Y4.3
NetC32_2: C32.2 D7.1
NetC33_2: C33.2 R21.1 U12.7 Y4.1
NetC34_2: C34.2 D8.1
NetC37_2: C37.2 L2.2 TP15.1 U12.18
NetD5_2: D5.2 D6.4
NetD5_4: D5.4 R18.1
NetD6_2: D6.2 D7.4
NetD7_2: D7.2 D8.4
NetJ3_1: J3.1 SW3.1 | length 290.2
  Top Layer w20: SW3.1 835,3405 835,3536.54 J3.1
NetJ4_1: J4.1 SW5.2
NetLED4_2: LED4.2 R12.2 TP8.1 | length 392.9
  Top Layer w20: LED4.2 1267.5,3618.5 1467.5,3618.5 R12.2 1477,3623 1643,3623 TP8.1
NetLED5_2: LED5.2 R14.2
NetLED6_2: LED6.2 R20.2
NetLED7_2: LED7.2 R22.1 | length 200
  Top Layer w20: LED7.2 R22.1
NetP2_1: P2.1 SW4.2
NetP4_1: P4.1 SW6.2
NetQ2_1: Q2.1 U7.1
NetU7_3: U7.3 U9.1
PB0_D8: J2.10 U12.12
PB1_D9: J2.9 U12.13
PB2_D10: J2.8 J5.3 U12.14
PB3_D11: J2.7 J5.5 U12.15
PB4_D12: BZ2.1 J2.6 J5.1 U12.16
PB5_D13: J2.5 J5.2 U12.17
PC6_RST: J7.3 R19.2 SW7.4 TP12.1 U12.29
PD2_D2: J6.6 U12.32
PD3_D3: J6.5 U12.1
PD4_D4: J6.4 U12.2
PD5_D5: J6.3 U12.9
PD6_D6: J6.2 R18.2 U12.10
PD7_D7: J6.1 U12.11
RX_328: J6.8 R22.2 TP14.1 U8.2 U12.30 | length 676
  Top Layer w6: TP14.1 435,2995.5 626.5,2804 R22.2 791.16,2804 816.47,2829.31 940,2829.31 965,2804.31 U8.2
TX_328: J6.7 R20.1 TP13.1 U8.3 U12.31 | length 524.5
  Top Layer w6: R20.1 626,2510 TP13.1 795,2516.82 1015,2736.82 U8.3
UD+_D+: J3.3 U8.5 U10.1 | length 2289.8
  Top Layer w6: J3.3 783.44,3547.97 783.44,3502.38 760.56,3479.5 727.88,3479.5 631.92,3575.45 631.92,3840.05 666.88,3875 1116.49,3875 1120,3871.49 1120,3510 1155.5,3474.5 1155.5,3319.44 1128.66,3292.6 U10.1 1061.65,3135.59 1040,3113.93 1040,2965.34 1115,2890.34 U8.5
UD-_D-: J3.2 U8.6 U10.3 | length 759.4
  Top Layer w6: U10.3 1046.5,3367.4 1033.51,3354.42 1031.37,3354.42 1007.92,3330.97 1007.92,3157.12 990,3139.19 990,2955 v1(1075,2870) ; U8.6 v1(1165,2870)
  Bottom Layer w6: v1(1075,2870) v1(1165,2870)
V_current+: Q2.2 R15.2 TP11.1 U7.2 U11.4
V_current-: R13.2 R15.1 TP11.2 U11.5
V_TH: C23.2 LED5.1 Q2.3 R16.1 SW4.1 SW5.1 SW6.1 TP9.1
V_VRM: R16.2 R17.1 TP10.1 U11.6
XI_OSC2: C19.2 R11.2 U8.7 Y3.3 | length 880
  Top Layer w6: U8.7 1215,2741.69 1240,2716.69 1450.43,2716.69 1491.22,2675.91 Y3.3 ; R11.2 1487.71,2430 1491.22,2433.51 Y3.3 ; C19.2@1685,2669 1684.03,2668.03 1650,2668.03 Y3.3
XO_OSC1: C20.1 R11.1 U8.8 Y3.1 | length 896.2
  Top Layer w6: R11.1@1266,2445 1266,2608.08 1190,2684.08 1190,2814.66 1204.64,2829.31 1240,2829.31 1265,2804.31 U8.8 1413.81,2773 Y3.1 1414.84,2980.16 C20.1
pads on no net: C25.1 J3.4 J4.2 J4.3 J4.4 J7.1 J7.2 U7.5 U7.6 U7.7 U8.9 U8.10 U8.11 U8.12 U8.14 U8.15 U9.6 U10.4 U10.6 U11.2 U12.19 U12.22

## Polygon pours and split planes (outlines as drawn)
no net on Int1 (GND) (split plane): 2479.9,20.1 20.1,20.1 20.1,3879.9 2479.9,3879.9
no net on Int2 (GND) (split plane): 2479.9,20.1 20.1,20.1 20.1,3879.9 2479.9,3879.9

## Keep-outs
Keep-Out Layer:
  the board outline again, w20

## Text inside footprints (layer, text, board x,y; h text height)
J1: Top Overlay "A5" at 259.07,202 h30 r315; Top Overlay "A4" at 259.07,302 h30 r315; Top Overlay "A3" at 259.07,402 h30 r315; Top Overlay "A2" at 259.07,502 h30 r315; Top Overlay "A0" at 262,702 h30 r315; Top Overlay "A1" at 262,602 h30 r315
J2: Top Overlay "D8" at 1954.41,1071 h30 r315; Top Overlay "D9~" at 1929.67,1194 h30 r315; Top Overlay "D10~" at 1912,1303 h30 r315; Top Overlay "D11~" at 1915.53,1404 h30 r315; Top Overlay "D12" at 1936.74,1497 h30 r315; Top Overlay "D13" at 1936.74,1588 h30 r315; Top Overlay "GND" at 1933.21,1694 h30 r315; Top Overlay "AREF" at 1912,1821 h30 r315; Top Overlay "SDA" at 1933.21,1897 h30 r315; Top Overlay "SCL" at 1933.21,1989 h30 r315
J6: Top Overlay "D7" at 1956.81,919 h30 r315; Top Overlay "D6~" at 1932.07,829 h30 r315; Top Overlay "D4" at 1955,613 h30 r315; Top Overlay "D3~" at 1935,529 h30 r315; Top Overlay "D2" at 1957,416 h30 r315; Top Overlay "D1" at 1965,309 h30 r315; Top Overlay "D0" at 1956.81,219 h30 r315; Top Overlay "D5~" at 1932.07,719 h30 r315
J7: Top Overlay "RESET" at 277.07,1400 h30 r315; Top Overlay "Vin" at 277.07,900 h30 r315; Top Overlay "GND" at 277.07,1000 h30 r315; Top Overlay "GND" at 277.07,1100 h30 r315; Top Overlay "5v" at 277.07,1200 h30 r315; Top Overlay "3v3" at 277.07,1300 h30 r315; Top Overlay "IOREF" at 268.39,1510 h30 r315; Top Overlay "NC" at 277.07,1600 h30 r315